# Altium PCB PCB1.PcbDoc
Units mm, origin at the board's own origin, x right, y up, seen from the top; angles counter-clockwise.
Board outline 50 x 27 mm, 2 copper layers (Top Layer, Bottom Layer); 12 components, 9 nets, 31 pads, 0 vias.
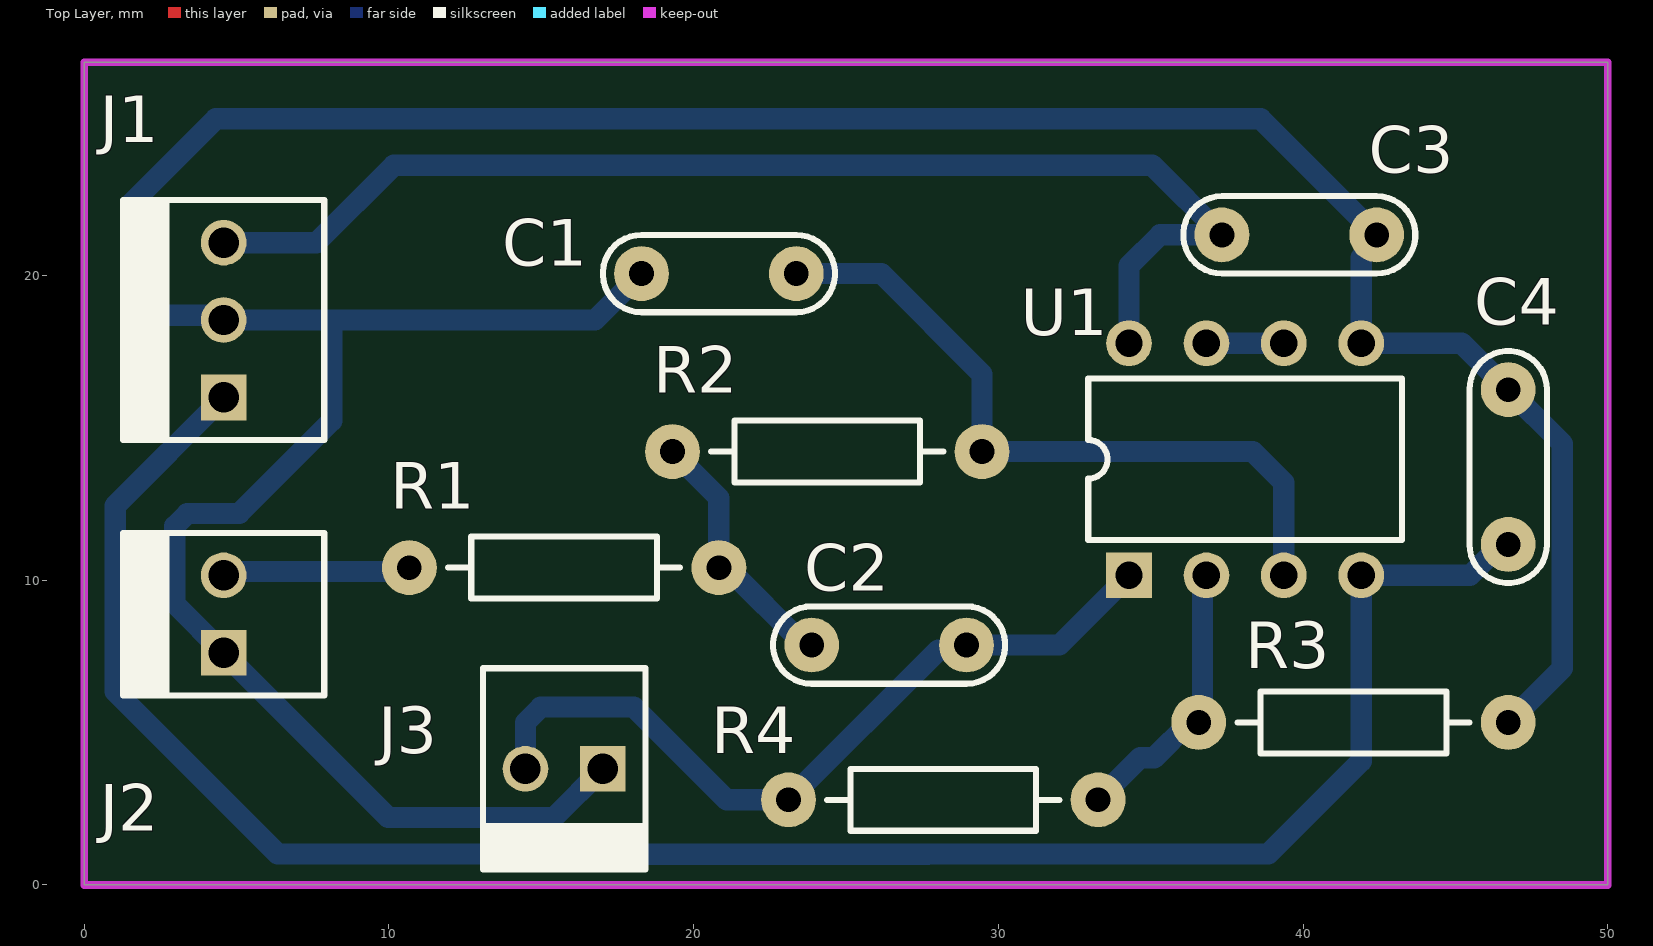
[diagram p0: Top Layer view]
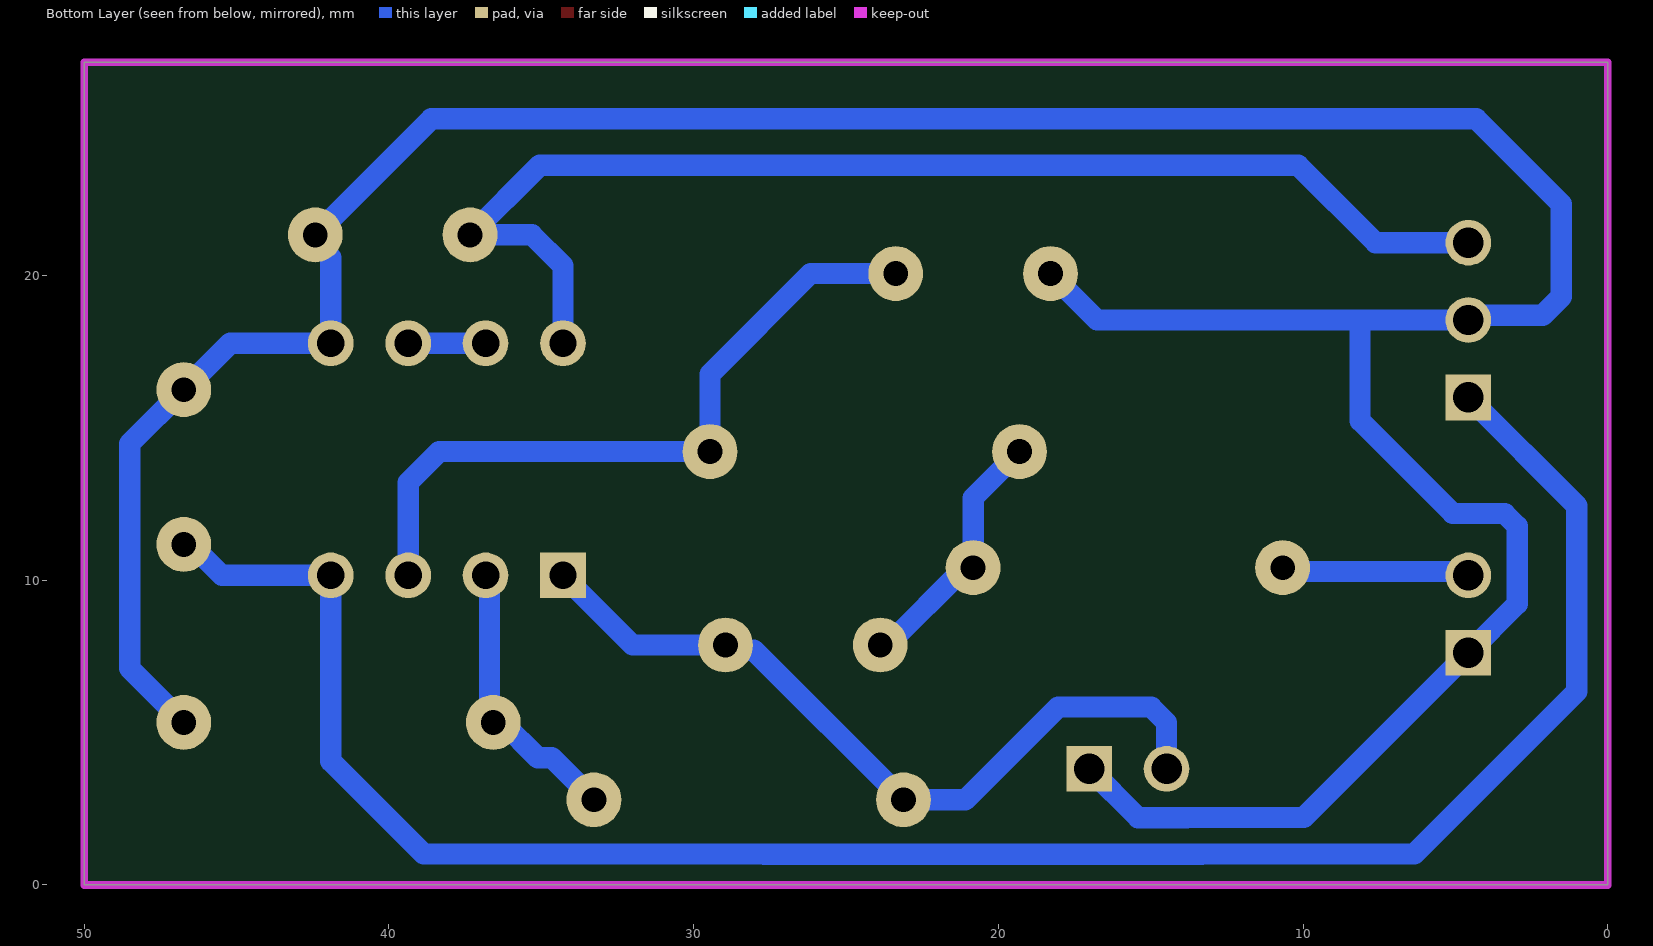
[diagram p1: Bottom Layer view, seen from below]
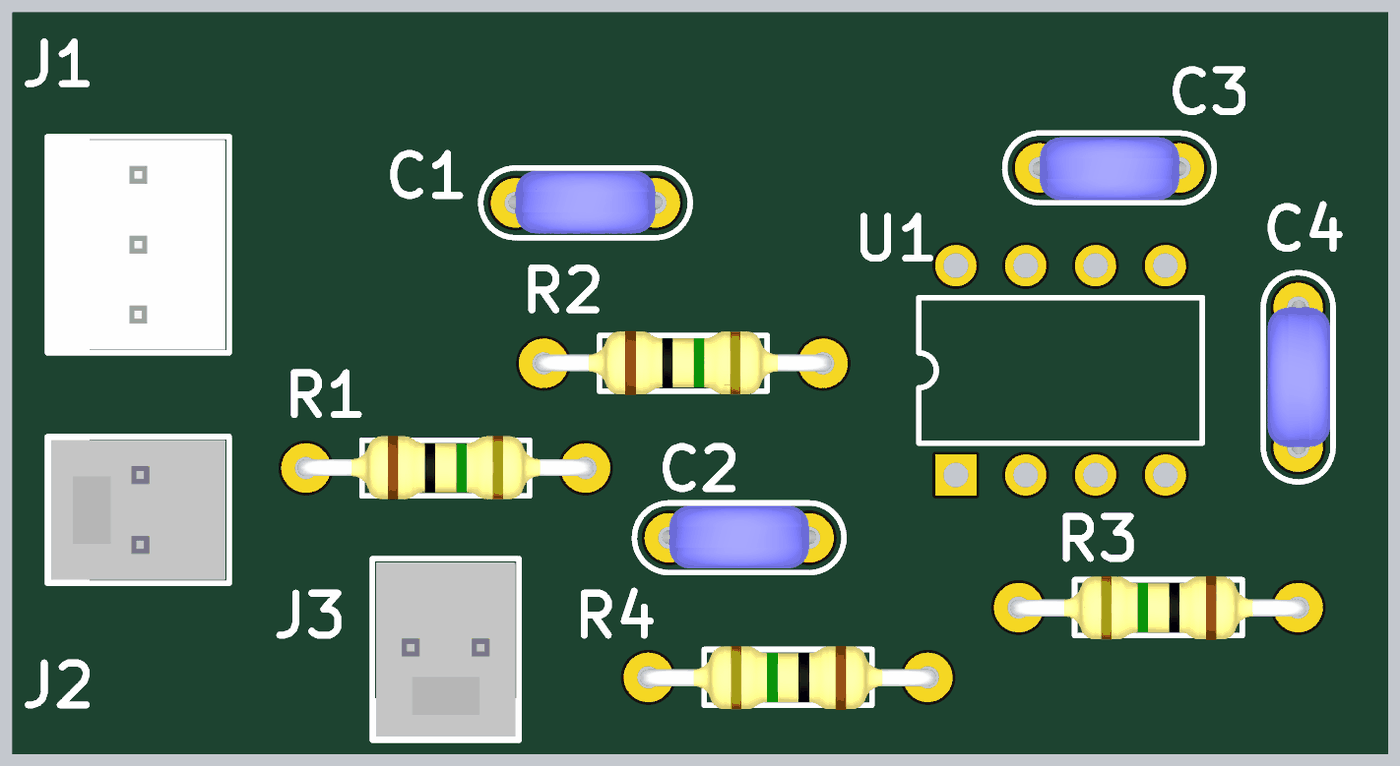
[diagram p2: 3D render of the assembled board from above, using the file's embedded part models]

## Layer stack, top to bottom
Top Solder: solder mask 0.0102, Solder Resist, Dk 3.5
Top Layer: signal copper 0.0356
Dielectric 1: dielectric 0.32, FR-4, Dk 4.8
Bottom Layer: signal copper 0.0356
Bottom Solder: solder mask 0.0102, Solder Resist, Dk 3.5

## Board outline
0,0 50,0 50,27 0,27

## Design rules (kind name [scope] priority, off if disabled: settings)
Clearance [All] p1: gap=0.5 ignorepadtopadclearanceinfootprint=FALSE
PolygonConnect [All] p1: connectstyle=Relief reliefconductorwidth=0.254 reliefentries=4 polygonreliefangle="90 Angle" airgapwidth=0.254
RoutingVias [All] p1: holewidth=0.711 width=1.5 viastyle="Through Hole" minholewidth=0.711 minwidth=1.5 maxholewidth=0.711 maxwidth=1.5
SolderMaskExpansion [All] p1: expansion=0.102 istentingtop=FALSE
Width [All] p1: maxlimit=1 minlimit=0.254 preferedwidth=0.7
30 further rules are at their usual default settings.

## Components (designator, comment, footprint, x,y, rotation, side; value= is the part's Value field where it differs from the comment)
C1 "10n" CAP200 20.828,20.066 r180 top
C2 "10n" CAP200 26.416,7.874 r180 top
C3 "0.1u" CAP200 39.878,21.336 r0 top
C4 "0.1u" CAP200 46.736,13.716 r90 top
J1 "SOURCE" MOLEX3 4.572,16.002 r90 top
J2 "INPUT" MOLEX2 4.572,7.62 r90 top
J3 "OUTPUT" MOLEX2 17.018,3.81 r180 top
R1 "15K" RES400 10.668,10.414 r0 top
R2 "15K" RES400 19.304,14.224 r0 top
R3 "10K" RES400 46.736,5.334 r180 top
R4 "10K" RES400 33.274,2.794 r180 top
U1 "TL082JG" JG008 38.1,13.97 r0 top

## Footprints (in the part's own frame and the unit in brackets; to place one, negate y for a bottom-side part, rotate by r counter-clockwise, add the part's x,y. Pads: shape width x height; smd on the part's side, far side on the other; paste and mask are expansions set on the pad)
CAP200 [mm]
  round 1.8 hole 0.813: 1(-2.54,0) 2(2.54,0)
  silkscreen extent -3.81,-1.27 3.81,1.27, body extent -2.79,-1.17 2.79,1.12, height 6.24
JG008 [mm] "DIP; 8 Leads; Row Spacing 7.62 mm; Pitch 2.54 mm"
  rect 1.5x1.5 hole 0.9: 1(-3.81,-3.81)
  round 1.5 hole 0.9: 2(-1.27,-3.81) 3(1.27,-3.81) 4(3.81,-3.81) 5(3.81,3.81) 6(1.27,3.81) 7(-1.27,3.81) 8(-3.81,3.81)
  silkscreen extent -5.15,-2.65 5.15,2.65
MOLEX2 [mm]
  rect 1.5x1.5 hole 1: 1(0,0)
  round 1.5 hole 1: 2(2.54,0)
  silkscreen extent -1.4,-3.3 3.94,3.3, body extent -1.27,-3.17 3.81,3.18, height 10.74
MOLEX3 [mm]
  rect 1.5x1.5 hole 1: 1(0,0)
  round 1.5 hole 1: 2(2.54,0) 3(5.08,0)
  silkscreen extent -1.4,-3.3 6.48,3.3, body extent -1.27,-3.17 6.35,3.18, height 10.74
RES400 [mm]
  round 1.8 hole 0.813: 1(0,0) 2(10.16,0)
  silkscreen extent 1.27,-1.02 8.89,1.02, body extent -0.3,-1.14 10.46,1.17, height 2.43

## Part data
C1 C2 C3 C4: library part CAP
J1: library part MOLEX3
J2 J3: library part MOLEX2
R1 R2 R3 R4: library part RES
U1: "JFET-Input Operational Amplifier", ComponentLink1Description="Manufacturer Link", ComponentLink1URL=http://www.ti.com/, ComponentLink2Description=Datasheet, ComponentLink2URL=http://www-s.ti.com/sc/ds/tl082.pdf, DatasheetVersion=Feb-1999, LatestRevisionDate=04-Mar-2005, LatestRevisionNote="Stylized 3D Model Added.", PackageDescription="DIP; 8 Leads; Row Spacing 7.62 mm; Pitch 2.54 mm", PackageReference=JG008, PackageVersion=Jan-1995, Published=16-Jan-2001, Publisher="Altium Limited"

## Nets (pads, with @x,y where several pads share a name; then routed paths per layer and width w, separated by ;. In a path a pad name is that pad's centre, name@x,y a point inside that pad or via, vN(x,y) a via of type N, cw(c..) or ccw(c..) an arc to the next point about the centre after c; other vN are vias at no path point)
+12V: C3.1 J1.3 U1.8 | length 40.8
  Bottom Layer w0.7: J1.3 7.62,21.082 10.16,23.622 35.052,23.622 C3.1 35.306,21.336 34.29,20.32 U1.8
-12V: C4.1 J1.1 U1.4 | length 66.8
  Bottom Layer w0.7: J1.1 1.016,12.446 1.016,6.35 6.35,1.016 13.312,1.016 13.318,1.01 27.68,1.01 27.686,1.016 38.862,1.016 41.91,4.064 U1.4 45.483,10.16 46.499,11.176 C4.1
GND: C1.2 C3.2 C4.2 J1.2 J2.1 J3.1 R3.1 U1.5 | length 116.1
  Bottom Layer w0.7: J3.1 15.418,2.21 13.815,2.21 13.809,2.216 9.976,2.216 J2.1 2.972,9.22 2.972,11.782 3.382,12.192 5.08,12.192 8.128,15.24 8.128,18.542 ; C1.2 16.764,18.542 8.128,18.542 ; R3.1 48.514,7.112 48.514,14.478 C4.2 45.212,17.78 U1.5 41.91,20.591 42.418,21.099 C3.2 38.608,25.146 4.318,25.146 1.524,22.352 1.524,19.304 2.133,18.695 4.419,18.695 J1.2 8.128,18.542
NetC1_1: C1.1 R2.2 U1.3 | length 23.4
  Bottom Layer w0.7: C1.1 26.162,20.066 29.464,16.764 R2.2 38.354,14.224 39.37,13.208 U1.3
NetC2_2: C2.2 R1.2 R2.1 | length 8.5
  Bottom Layer w0.7: R2.1 20.828,12.7 R1.2 21.099,10.414 23.639,7.874 C2.2
NetR3_2: R3.2 R4.1 U1.2 | length 9.3
  Bottom Layer w0.7: R4.1 34.653,4.173 35.117,4.173 36.278,5.334 R3.2 36.703,5.461 36.703,10.033 U1.2
NetU1_6: U1.6 U1.7 | length 2.5
  Bottom Layer w0.7: U1.7 U1.6
Vin: J2.2 R1.1 | length 6.2
  Bottom Layer w0.7: J2.2 4.699,10.287 10.541,10.287 R1.1
Vout: C2.1 J3.2 R4.2 U1.1 | length 25.9
  Bottom Layer w0.7: J3.2 14.478,5.334 14.986,5.842 18.034,5.842 21.082,2.794 R4.2 28.027,7.707 28.789,7.707 C2.1 32.004,7.874 U1.1

## Keep-outs
Keep-Out Layer:
  the board outline again, w0.254